# Altium PCB ICAN-7006-STM.PcbDoc (part 1 of 2)
Units mm, origin at the board's own origin, x right, y up, seen from the top; angles counter-clockwise.
Board outline 150 x 80 mm, 3 copper layers (Top Layer, DC3.3V, Bottom Layer); 45 components, 160 nets, 710 pads, 0 vias.
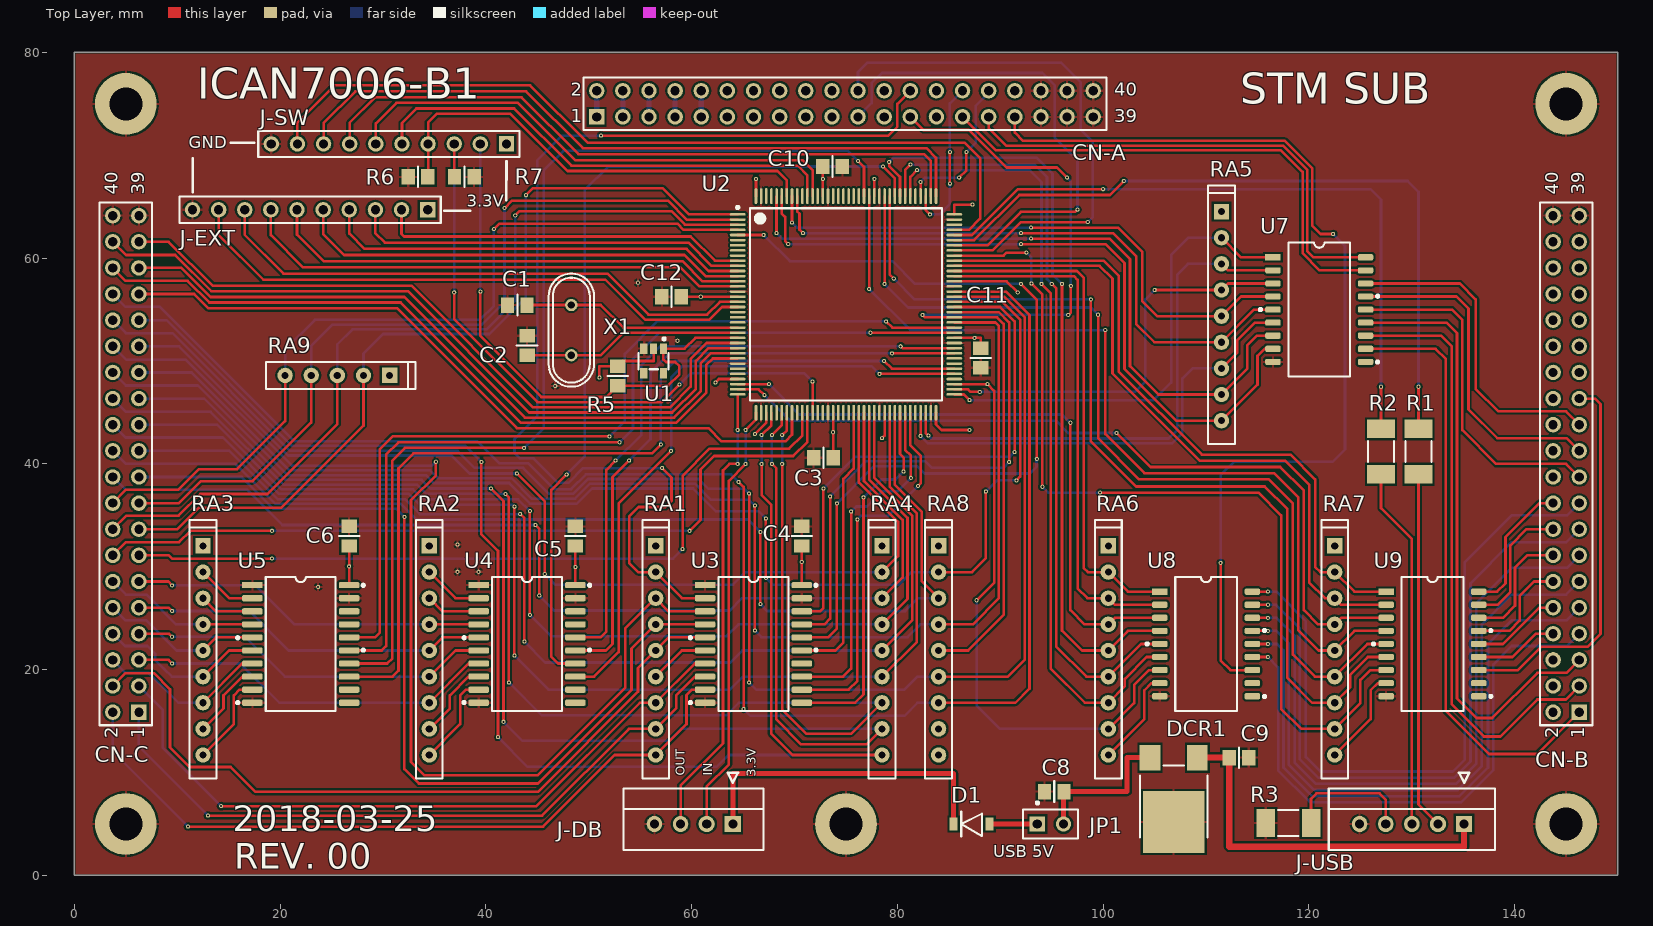
[diagram p0: Top Layer view]
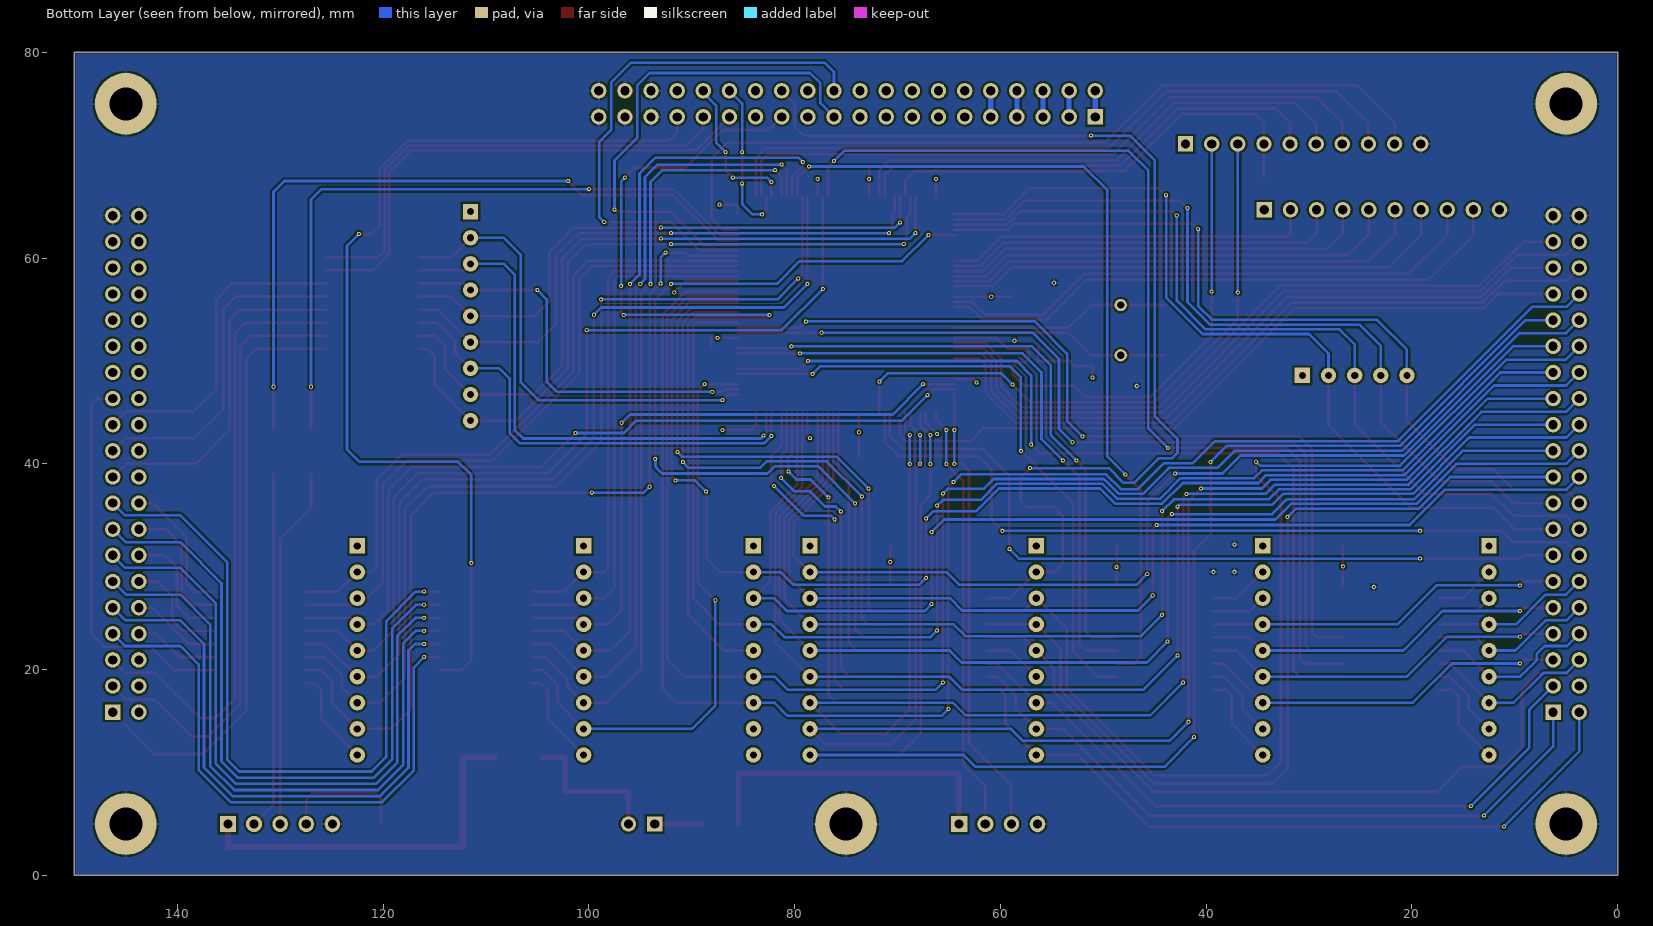
[diagram p1: Bottom Layer view, seen from below]
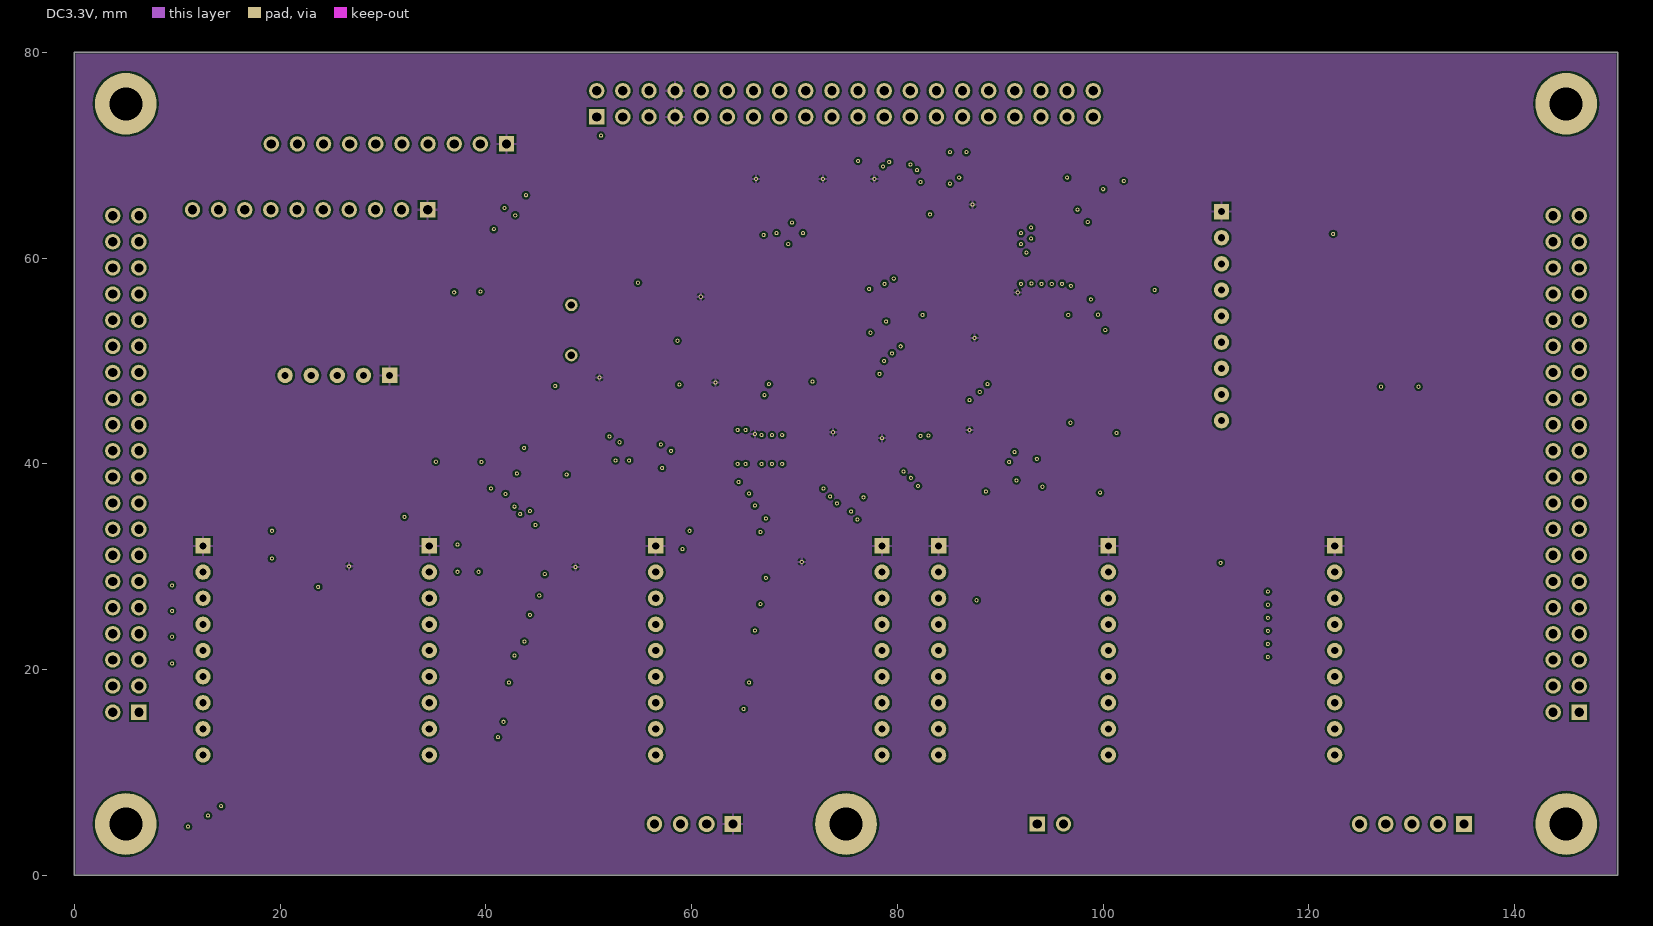
[diagram p2: DC3.3V]

## Layer stack, top to bottom
Top Layer: signal copper 0.0356
Dielectric: core 0.32, FR-4, Dk 4.8
DC3.3V: signal copper 0.0356
Dielectric: prepreg 0.32, FR-4, Dk 4.8
Bottom Layer: signal copper 0.0356

## Board outline
0,0 0,80 150,80 150,0

## Design rules (kind name [scope] priority, off if disabled: settings)
Clearance [All] p1: gap=0.2
FabricationTestPointUsage TestPointUsage [All] p1: valid=0 allowmultiple=FALSE
FabricationTestpoint Testpoint [All] p1: side=3 testpointundercomponent=TRUE minsize=1.016 maxsize=2.54 preferedsize=1.524 minholesize=0 maxholesize=1.016 preferedholesize=0.813 testpointgrid=0.025 allowsidetop=TRUE allowsidebottom=TRUE usegrid=TRUE gridtolerance=0
HoleSize [All] p1: absolutevalues=TRUE maxlimit=4 minlimit=0.025 maxpercent=80.000 minpercent=20.000
PolygonConnect [All] p1: connectstyle=Relief reliefconductorwidth=0.254 reliefentries=4 polygonreliefangle="90 Angle"
RoutingVias [All] p1: holewidth=0.2 width=0.4 viastyle="Through Hole" minholewidth=0.2 minwidth=0.4 maxholewidth=4 maxwidth=8
SilkscreenOverComponentPads [All] p1: minsilkscreentomaskgap=0.254
SolderMaskExpansion [All] p1: expansion=0.102
Width [All] p1: maxlimit=2 minlimit=0.254 preferedwidth=0.254
24 further rules are at their usual default settings.

## Components (designator, comment, footprint, x,y, rotation, side; value= is the part's Value field where it differs from the comment)
C1 "20pF" [0805]2012 43.05,55.44 r180 top
C2 "20pF" [0805]2012 44,51.51 r90 top
C3 "0.1uF" [0805]2012 72.8,40.6 r0 top
C4 "0.1uF" [0805]2012 70.7,32.975 r270 top
C5 "0.1uF" [0805]2012 48.7,32.975 r270 top
C6 "0.1uF" [0805]2012 26.7,32.975 r270 top
C8 "2.2uF" [0805]2012 95.24,8.153 r0 top
C9 "0.33uF" [0805]2012 113.2,11.45 r180 top
C10 "0.1uF" [0805]2012 73.7,68.909 r180 top
C11 "0.1uF" [0805]2012 88.1,50.3 r90 top
C12 "0.1uF" [0805]2012 58.05,56.25 r0 top
CN-A "25-1201-220" HDR2X20 50.77,73.73 r0 top
CN-B "25-1201-220" HDR2X20 146.27,15.87 r90 top
CN-C "25-1201-220" HDR2X20 6.27,15.87 r90 top
D1 "BAT60J" "[1107]2807 DIODE" 87.2,5 r0 top
DCR1 "NJM2845DL1-33" TO-252-3 106.85,5.2 r270 top
J-DB "C3" C3-S4 64,5 r0 top
J-EXT "Header 10" HDR1X10 34.34,64.7 r180 top
J-SW "Header 10" HDR1X10 42,71.1 r180 top
J-USB "C3" C3-S5 135.08,5 r0 top
JP1 "Jumper" PIN2 93.6,5 r0 top
R1 "0" 5025[2010] 130.65,41.2 r270 top
R2 "0" 5025[2010] 127,41.2 r270 top
R3 "100k" 5025[2010] 118,5.1 r0 top
R5 "10k" [0805]2012 52.8,48.55 r90 top
R6 "10k" [0805]2012 33.4,67.9 r180 top
R7 "10k" [0805]2012 37.9,67.9 r0 top
RA1 "1k,1/8w" "SIP 9P" 56.5,32.025 r0 top
RA2 "1k,1/8w" "SIP 9P" 34.5,32.025 r0 top
RA3 "1k,1/8w" "SIP 9P" 12.5,32.025 r0 top
RA4 "1k,1/8w" "SIP 9P" 78.5,32.025 r0 top
RA5 "1k,1/8w" "SIP 9P" 111.5,64.525 r0 top
RA6 "1k,1/8w" "SIP 9P" 100.5,32.025 r0 top
RA7 "1k,1/8w" "SIP 9P" 122.5,32.025 r0 top
RA8 "1k,1/8w" "SIP 9P" 84,32.025 r0 top
RA9 "1k,1/8w" "SIP 5P" 30.64,48.6 r270 top
U1 "BD4828G" PST596 56.3,50 r270 top
U2 "STM32F103ZET6" STM-LQFP144_L 75,55.5 r0 top
U3 "74LVC540ADW" SO-20 66,22.5 r0 top
U4 "74LVC540ADW" SO-20 44,22.5 r0 top
U5 "74LVC540ADW" SO-20 22,22.5 r0 top
U7 "TD62083AFG" TD6208X(SOP) 121,55 r0 top
U8 "TD62083AFG" TD6208X(SOP) 110,22.5 r0 top
U9 "TD62083AFG" TD6208X(SOP) 132,22.5 r0 top
X1 "8MHz" "CRYSTAL 49S" 48.3,53 r90 top

## Footprints (in the part's own frame and the unit in brackets; to place one, negate y for a bottom-side part, rotate by r counter-clockwise, add the part's x,y. Pads: shape width x height; smd on the part's side, far side on the other; paste and mask are expansions set on the pad)
5025[2010] [mm] "Chip Resistor; Body 5.0 x 2.5 mm (LxW typ)"
  rect 1.8x2.7 smd: 1(-2.2,0) 2(2.2,0)
  silkscreen extent -1,-1.25 1,1.25
[0805]2012 [mm] "SMD 2.0x1.25"
  rect 1.3x1.5 smd: 1(-0.95,0) 2(0.95,0)
  silkscreen extent 0,-1 0,1
"[1107]2807 DIODE" [mm] "SMD DIODE 3mm x 1.8mm"
  rect 0.78x1.22 smd: 1(-1.74,0)
  rect 0.8x1.22 smd: 2(1.74,0)
  silkscreen extent -1,-1.2 1,1.2
C3-S4 [mm] "2.54"
  rect 1.575x1.575 hole 0.89: 1(0,0)
  round 1.575 hole 0.89: 2(-2.54,0)
  oval 1.5x1.575 hole 0.89: 3(-5.08,0) 4(-7.62,0)
  silkscreen extent -10.62,-2.54 3,5
C3-S5 [mm] "2.54"
  rect 1.575x1.575 hole 0.89: 1(0,0)
  round 1.575 hole 0.89: 2(-2.54,0)
  oval 1.5x1.575 hole 0.89: 3(-5.08,0) 4(-7.62,0) 5(-10.16,0)
  silkscreen extent -13.16,-2.54 3,5
"CRYSTAL 49S" [mm] "BODY 10.7 x 4.3 PITCH 4.8"
  round 1.2 hole 0.7: 1(-2.44,0) 2(2.44,0)
  silkscreen extent -5.5,-2.2 5.5,2.2
HDR1X10 [mm] "Connector; Header; 10 Position"
  rect 1.5x1.5 hole 0.9: 1(0,0)
  round 1.5 hole 0.9: 2(2.54,0) 3(5.08,0) 4(7.62,0) 5(10.16,0) 6(12.7,0) 7(15.24,0) 8(17.78,0) 9(20.32,0) 10(22.86,0)
  silkscreen extent -1.27,-1.27 24.13,1.27
HDR2X20 [mm] "Connector; Header; 20x2 Position"
  rect 1.5x1.5 hole 0.9: 1(0,0)
  round 1.5 hole 0.9: 2(0,2.54) 3(2.54,0) 4(2.54,2.54) 5(5.08,0) 6(5.08,2.54) 7(7.62,0) 8(7.62,2.54) 9(10.16,0) 10(10.16,2.54) 11(12.7,0) 12(12.7,2.54) 13(15.24,0) 14(15.24,2.54) 15(17.78,0) 16(17.78,2.54) 17(20.32,0) 18(20.32,2.54) 19(22.86,0) 20(22.86,2.54) 21(25.4,0) 22(25.4,2.54) 23(27.94,0) 24(27.94,2.54) 25(30.48,0) 26(30.48,2.54) 27(33.02,0) 28(33.02,2.54) 29(35.56,0) 30(35.56,2.54) 31(38.1,0) 32(38.1,2.54) 33(40.64,0) 34(40.64,2.54) 35(43.18,0) 36(43.18,2.54) 37(45.72,0) 38(45.72,2.54) 39(48.26,0) 40(48.26,2.54)
  silkscreen extent -1.27,-1.27 49.53,3.81
PIN2 [mm] "Photosensitive Diode; 2 Leads"
  rect 1.5x1.5 hole 0.9: 1(0,0)
  round 1.5 hole 0.9: 2(2.54,0)
  silkscreen extent -1.4,-1.4 3.94,2.17
PST596 [mm] "MISUMI RESET IC"
  rect 1x0.7 smd: 1(-1.2,0.95) 2(-1.2,0) 3(-1.2,-0.95) 4(1.2,-0.95) 5(1.2,0.95)
  silkscreen extent -2.28,-1.45 0.8,1.45
"SIP 5P" [mm] "Single inline pitch=2.54"
  rect 1.5x1.5 hole 0.7: 1(0,0)
  round 1.5 hole 0.7: 2(0,-2.54) 3(0,-5.08) 4(0,-7.62) 5(0,-10.16)
  silkscreen extent -1.3,-12 1.3,2.52
"SIP 9P" [mm] "Single inline pitch=2.54"
  rect 1.5x1.5 hole 0.7: 1(0,0)
  round 1.5 hole 0.7: 2(0,-2.54) 3(0,-5.08) 4(0,-7.62) 5(0,-10.16) 6(0,-12.7) 7(0,-15.24) 8(0,-17.78) 9(0,-20.32)
  silkscreen extent -1.3,-22.6 1.3,2.52
SO-20 [mm] "SOP Pitch1.27, 20Pin, W=7.4mm"
  rect 2x0.6 smd: 1(-4.7,5.715)
  rrect50% 2x0.6 smd: 2(-4.7,4.445) 3(-4.7,3.175) 4(-4.7,1.905) 5(-4.7,0.635) 6(-4.7,-0.635) 7(-4.7,-1.905) 8(-4.7,-3.175) 9(-4.7,-4.445) 10(-4.7,-5.715) 11(4.7,-5.715) 12(4.7,-4.445) 13(4.7,-3.175) 14(4.7,-1.905) 15(4.7,-0.635) 16(4.7,0.635) 17(4.7,1.905) 18(4.7,3.175) 19(4.7,4.445) 20(4.7,5.715)
  silkscreen extent -6.25,-6.5 6.2,6.51
STM-LQFP144_L [mm] "Thin QFP, 144-Leads, Body 20x20mm, Pitch 0.5mm, IPC High Density"
  oval 1.55x0.25 smd: 1(-10.525,8.75) 2(-10.525,8.25) 3(-10.525,7.75) 4(-10.525,7.25) 5(-10.525,6.75) 6(-10.525,6.25) 7(-10.525,5.75) 8(-10.525,5.25) 9(-10.525,4.75) 10(-10.525,4.25) 11(-10.525,3.75) 12(-10.525,3.25) 13(-10.525,2.75) 14(-10.525,2.25) 15(-10.525,1.75) 16(-10.525,1.25) 17(-10.525,0.75) 18(-10.525,0.25) 19(-10.525,-0.25) 20(-10.525,-0.75) 21(-10.525,-1.25) 22(-10.525,-1.75) 23(-10.525,-2.25) 24(-10.525,-2.75) 25(-10.525,-3.25) 26(-10.525,-3.75) 27(-10.525,-4.25) 28(-10.525,-4.75) 29(-10.525,-5.25) 30(-10.525,-5.75) 31(-10.525,-6.25) 32(-10.525,-6.75) 33(-10.525,-7.25) 34(-10.525,-7.75) 35(-10.525,-8.25) 36(-10.525,-8.75) 73(10.525,-8.75) 74(10.525,-8.25) 75(10.525,-7.75) 76(10.525,-7.25) 77(10.525,-6.75) 78(10.525,-6.25) 79(10.525,-5.75) 80(10.525,-5.25) 81(10.525,-4.75) 82(10.525,-4.25) 83(10.525,-3.75) 84(10.525,-3.25) 85(10.525,-2.75) 86(10.525,-2.25) 87(10.525,-1.75) 88(10.525,-1.25) 89(10.525,-0.75) 90(10.525,-0.25) 91(10.525,0.25) 92(10.525,0.75) 93(10.525,1.25) 94(10.525,1.75) 95(10.525,2.25) 96(10.525,2.75) 97(10.525,3.25) 98(10.525,3.75) 99(10.525,4.25) 100(10.525,4.75) 101(10.525,5.25) 102(10.525,5.75) 103(10.525,6.25) 104(10.525,6.75) 105(10.525,7.25) 106(10.525,7.75) 107(10.525,8.25) 108(10.525,8.75)
  oval 0.25x1.55 smd: 37(-8.75,-10.525) 38(-8.25,-10.525) 39(-7.75,-10.525) 40(-7.25,-10.525) 41(-6.75,-10.525) 42(-6.25,-10.525) 43(-5.75,-10.525) 44(-5.25,-10.525) 45(-4.75,-10.525) 46(-4.25,-10.525) 47(-3.75,-10.525) 48(-3.25,-10.525) 49(-2.75,-10.525) 50(-2.25,-10.525) 51(-1.75,-10.525) 52(-1.25,-10.525) 53(-0.75,-10.525) 54(-0.25,-10.525) 55(0.25,-10.525) 56(0.75,-10.525) 57(1.25,-10.525) 58(1.75,-10.525) 59(2.25,-10.525) 60(2.75,-10.525) 61(3.25,-10.525) 62(3.75,-10.525) 63(4.25,-10.525) 64(4.75,-10.525) 65(5.25,-10.525) 66(5.75,-10.525) 67(6.25,-10.525) 68(6.75,-10.525) 69(7.25,-10.525) 70(7.75,-10.525) 71(8.25,-10.525) 72(8.75,-10.525) 109(8.75,10.525) 110(8.25,10.525) 111(7.75,10.525) 112(7.25,10.525) 113(6.75,10.525) 114(6.25,10.525) 115(5.75,10.525) 116(5.25,10.525) 117(4.75,10.525) 118(4.25,10.525) 119(3.75,10.525) 120(3.25,10.525) 121(2.75,10.525) 122(2.25,10.525) 123(1.75,10.525) 124(1.25,10.525) 125(0.75,10.525) 126(0.25,10.525) 127(-0.25,10.525) 128(-0.75,10.525) 129(-1.25,10.525) 130(-1.75,10.525) 131(-2.25,10.525) 132(-2.75,10.525) 133(-3.25,10.525) 134(-3.75,10.525) 135(-4.25,10.525) 136(-4.75,10.525) 137(-5.25,10.525) 138(-5.75,10.525) 139(-6.25,10.525) 140(-6.75,10.525) 141(-7.25,10.525) 142(-7.75,10.525) 143(-8.25,10.525) 144(-8.75,10.525)
  silkscreen extent -10.65,-9.35 9.35,9.55, body extent -10,-10 10,10, height 1.6
TD6208X(SOP) [mm]
  rect 1.5x0.6 smd: 1(-4.5,5.08)
  rrect50% 1.5x0.6 smd: 2(-4.5,3.81) 3(-4.5,2.54) 4(-4.5,1.27) 5(-4.5,0) 6(-4.5,-1.27) 7(-4.5,-2.54) 8(-4.5,-3.81) 9(-4.5,-5.08) 10(4.5,-5.08) 11(4.5,-3.81) 12(4.5,-2.54) 13(4.5,-1.27) 14(4.5,0) 15(4.5,1.27) 16(4.5,2.54) 17(4.5,3.81) 18(4.5,5.08)
  silkscreen extent -5.85,-6.5 5.8,6.51
TO-252-3 [mm] "NJM2845"
  rect 2.5x2 smd: 1(-6.25,2.3) 3(-6.25,-2.3)
  rect 6x6 smd: 2(0,0)
  silkscreen extent -5.5,-3.27 1.5,3.27

## Part data
C1 C2 C3 C9 C10 C11 C12: library part "Cap Semi", "Capacitor (Semiconductor SIM Model)"
C4 C5 C6: library part Cap, "Capacitor"
C8: library part "Cap Pol3", "Polarized Capacitor (Surface Mount)"
CN-A CN-B: library part "Header 25X2", "Header, 25-Pin, Dual row"
CN-C: library part "Header 20X2", "Header, 20-Pin, Dual row"
D1: library part Diode, "Default Diode"
DCR1: library part IC10
J-DB: library part "Header 4", "Header, 4-Pin"
J-EXT J-SW: "Header, 10-Pin"
J-USB: library part MHDR1X6, "Header, 6-Pin"
JP1: "Jumper Wire"
R1 R2 R3 R5 R6 R7: library part Res3, "Resistor"
RA1 RA2 RA3 RA4 RA5 RA6 RA7 RA8 RA9: library part "RES 8P"
U1: library part IC5-WIDE
U2: "ARM Cortex-M3 32-bit MCU, 512 KB Flash, 64 KB Internal RAM, 112 I/Os, 144-pin LQFP, -40 to 85 degC, Tray"
U3 U4 U5: library part SN74LS540N, "Octal Buffer and Line Driver with 3-State Outputs"
U7 U8 U9: library part TD62083
X1: library part XTAL, "Crystal Oscillator"

## Free pads (board coordinates)
  round 6 hole 3.2: 0(5,5) 0(5,75) 0(75,5) 0(145,5) 0(145,75)
  round 0.4 hole 0.2: 0(9.5,20.6) 0(9.5,23.2) 0(9.5,25.7) 0(9.5,28.2) 0(11.05,4.75) 0(12.983,5.817) 0(14.269,6.731) 0(19.2,30.8) 0(19.202,33.5) 0(23.698,28.042) 0(26.7,30.048) 0(32.08,34.853) 0(35.128,40.208) 0(36.92,56.68) 0(37.236,29.515) 0(37.236,32.156) 0(39.294,29.515) 0(39.46,56.74) 0(39.561,40.195) 0(40.488,37.615) 0(40.767,62.814) 0(41.171,13.439) 0(41.707,14.935) 0(41.808,64.872) 0(41.91,37.081) 0(42.237,18.745) 0(42.771,21.364) 0(42.774,35.839) 0(42.85,64.16) 0(43.005,39.063) 0(43.332,35.126) 0(43.713,41.554) 0(43.736,22.73) 0(43.891,66.116) 0(44.275,25.329) 0(44.275,35.413) 0(44.806,34.061) 0(45.187,27.203) 0(45.72,29.286) 0(46.736,47.574) 0(47.854,38.964) 0(48.7,29.972) 0(51.029,48.387) 0(51.181,71.907) 0(52,42.678) 0(52.603,40.335) 0(53,42.103) 0(53.927,40.335) 0(54.771,57.608) 0(57,41.885) 0(57.127,39.596) 0(58,41.267) 0(58.623,51.968) 0(58.8,47.7) 0(59.114,31.714) 0(59.8,33.5) 0(60.884,56.25) 0(62.3,47.9) 0(64.475,40) 0(64.475,43.3) 0(64.567,38.24) 0(65.049,16.18) 0(65.25,40) 0(65.25,43.3) 0(65.583,18.745) 0(65.583,37.109) 0(66.139,23.8) 0(66.139,35.944) 0(66.142,42.901) 0(66.25,67.7) 0(66.675,26.365) 0(66.675,33.376) 0(66.8,40) 0(66.8,42.8) 0(67,62.25) 0(67.071,46.679) 0(67.208,28.927) 0(67.208,34.696) 0(67.5,47.75) 0(67.8,40) 0(67.8,42.8) 0(68.25,62.433) 0(68.8,40) 0(68.8,42.8) 0(69.386,61.364) 0(69.75,63.448) 0(70.7,30.48) 0(70.819,62.431) 0(71.75,48) 0(72.75,67.7) 0(72.8,37.596) 0(73.457,36.83) 0(73.75,43.078) 0(74.117,36.17) 0(75.5,35.368) 0(76.1,34.596) 0(76.174,69.445) 0(76.7,36.754) 0(77.25,57) 0(77.368,52.75) 0(77.75,67.7) 0(78.25,48.75) 0(78.5,42.5) 0(78.591,68.909) 0(78.7,50) 0(78.75,57.5) 0(78.902,53.848) 0(79.2,69.35) 0(79.477,50.75) 0(79.643,58) 0(80.318,51.432) 0(80.6,39.25) 0(81.255,69.092) 0(81.3,38.65) 0(81.902,68.552) 0(82,37.85) 0(82.25,42.723) 0(82.25,67.4) 0(82.448,54.483) 0(83.007,42.743) 0(83.16,64.262) 0(85.1,67.234) 0(85.1,70.3) 0(86.004,67.818) 0(86.7,70.3) 0(87,43.3) 0(87,46.2) 0(87.3,65.2) 0(87.5,52.25) 0(87.7,26.746) 0(88,47) 0(88.595,37.313) 0(88.75,47.75) 0(90.853,40.183) 0(91.387,41.145) 0(91.562,38.4) 0(91.694,56.667) 0(92,57.5) 0(92,61.364) 0(92,62.431) 0(92.532,60.528) 0(93,61.897) 0(93,62.964) 0(93.015,57.531) 0(93.546,40.484) 0(94,57.5) 0(94.079,37.779) 0(95,57.5) 0(96,57.5) 0(96.495,67.818) 0(96.6,54.483) 0(96.8,44) 0(96.85,57.302) 0(97.5,64.709) 0(98.5,63.5) 0(98.8,56) 0(99.5,54.5) 0(99.7,37.2) 0(100,66.7) 0(100.2,53) 0(101.3,43) 0(102,67.5) 0(105.005,56.905) 0(111.42,30.38) 0(116,21.23) 0(116,22.5) 0(116,23.77) 0(116,25.04) 0(116,26.31) 0(116,27.58) 0(122.35,62.35) 0(127,47.5) 0(130.65,47.5)

## Nets (pads, with @x,y where several pads share a name; then routed paths per layer and width w, separated by ;. In a path a pad name is that pad's centre, name@x,y a point inside that pad or via, vN(x,y) a via of type N, cw(c..) or ccw(c..) an arc to the next point about the centre after c; other vN are vias at no path point)
*LIGHT_ON: CN-A.33 pad.0@111.42,30.38 pad.0@122.35,62.35 U8.12 | length 95.8
  Top Layer w0.254: CN-A.33@91.41,73.73 91.41,72.19 92.2,71.4 117.652,71.4 120.3,68.752 120.3,63.19 121.14,62.35 pad.0@122.35,62.35 ; pad.0@111.42,30.38 111.42,20.9 112.36,19.96 U8.12@114.5,19.96
  Bottom Layer w0.254: pad.0@111.42,30.38 111.42,38.92 112.7,40.2 122.3,40.2 123.5,41.4 123.5,61.2 pad.0@122.35,62.35
*MF-DIR: CN-B.3 U7.12 | length 59.3
  Top Layer w0.254: U7.12@125.5,52.46 132.84,52.46 133.859,51.441 133.859,16.641 137,13.5 138.6,13.5 142.2,17.1 144.96,17.1 CN-B.3@146.27,18.41
*MF-ENB: CN-B.5 U7.13 | length 59.8
  Top Layer w0.254: U7.13@125.5,53.73 133.37,53.73 134.384,52.716 134.384,17.216 136.3,15.3 137.8,15.3 142.2,19.7 145.02,19.7 CN-B.5@146.27,20.95
*ML-ALM: CN-C.8 RA3.6 U5.6 | length 16.7
  Top Layer w0.254: RA3.6@12.5,19.325 15.04,21.865 U5.6@17.3,21.865
  Bottom Layer w0.254: CN-C.8@3.73,23.49 4.92,22.3 7.1,22.3 7.844,21.556 7.844,20.956 8.731,20.069 9.475,19.325 RA3.6@12.5,19.325
*ML-BRAKE: CN-B.10 U9.14 | length 8.7
  Top Layer w0.254: U9.14@136.5,22.5 138.853,22.5 142.383,26.03 CN-B.10@143.73,26.03
*ML-ENB: CN-B.12 U9.15 | length 10.6
  Top Layer w0.254: U9.15@136.5,23.77 139.47,23.77 140.485,24.785 140.485,27.185 141.87,28.57 CN-B.12@143.73,28.57
*ML-F/*R: CN-B.8 U9.13 | length 8.2
  Top Layer w0.254: U9.13@136.5,21.23 139.772,21.23 142.032,23.49 CN-B.8@143.73,23.49
*ML-PG: CN-C.6 RA3.7 U5.7 | length 16.9
  Top Layer w0.254: RA3.7@12.5,16.785 16.31,20.595 U5.7@17.3,20.595
  Bottom Layer w0.254: CN-C.6@3.73,20.95 4.98,19.7 7.2,19.7 10.115,16.785 RA3.7@12.5,16.785
*MLL-PG_B: CN-C.12 RA3.4 U5.4 | length 15.3
  Top Layer w0.254: RA3.4@12.5,24.405 U5.4@17.3,24.405
  Bottom Layer w0.254: CN-C.12@3.73,28.57 5,27.3 7,27.3 9.895,24.405 RA3.4@12.5,24.405
*MLL-PG_F: CN-C.10 RA3.5 U5.5 | length 15.8
  Top Layer w0.254: RA3.5@12.5,21.865 13.77,23.135 U5.5@17.3,23.135
  Bottom Layer w0.254: CN-C.10@3.73,26.03 4.96,24.8 7,24.8 9.935,21.865 RA3.5@12.5,21.865
*MLR-PG_B: CN-C.11 pad.0@9.5,28.2 RA2.4 U4.4 | length 34.8
  Top Layer w0.254: CN-C.11@6.27,28.57 9.13,28.57 pad.0@9.5,28.2 ; RA2.4@34.5,24.405 U4.4@39.3,24.405
  Bottom Layer w0.254: pad.0@9.5,28.2 17.6,28.2 21.395,24.405 RA2.4@34.5,24.405
*MLR-PG_F: CN-C.9 pad.0@9.5,25.7 RA2.5 U4.5 | length 35.3
  Top Layer w0.254: CN-C.9@6.27,26.03 9.17,26.03 pad.0@9.5,25.7 ; RA2.5@34.5,21.865 35.77,23.135 U4.5@39.3,23.135
  Bottom Layer w0.254: pad.0@9.5,25.7 17,25.7 20.835,21.865 RA2.5@34.5,21.865
*MOTOR_ON1: CN-A.29 U7.17 | length 50
  Top Layer w0.254: CN-A.29@86.33,73.73 89.578,70.482 117.269,70.482 119.38,68.372 119.38,60.476 121.046,58.81 U7.17@125.5,58.81
*MOTOR_ON2: CN-A.31 U7.18 | length 47.6
  Top Layer w0.254: CN-A.31@88.87,73.73 88.87,72.63 90.56,70.94 117.46,70.94 119.835,68.565 119.835,60.665 120.42,60.08 U7.18@125.5,60.08
*MR-ALM: CN-C.7 pad.0@9.5,23.2 RA2.6 U4.6 | length 35.8
  Top Layer w0.254: CN-C.7@6.27,23.49 9.21,23.49 pad.0@9.5,23.2 ; RA2.6@34.5,19.325 37.04,21.865 U4.6@39.3,21.865
  Bottom Layer w0.254: pad.0@9.5,23.2 16.6,23.2 20.475,19.325 RA2.6@34.5,19.325
*MR-BRAKE: CN-B.9 pad.0@116,22.5 U8.14 | length 59.2
  Top Layer w0.254: U8.14@114.5,22.5 pad.0@116,22.5
  Bottom Layer w0.254: pad.0@116,22.5 116.9,22.5 117.525,21.875 117.525,10.475 120.3,7.7 134.622,7.7 137.4,10.478 137.4,22.5 139.7,24.8 145.04,24.8 CN-B.9@146.27,26.03
*MR-ENB: CN-B.11 pad.0@116,23.77 U8.15 | length 61.5
  Top Layer w0.254: U8.15@114.5,23.77 pad.0@116,23.77
  Bottom Layer w0.254: pad.0@116,23.77 116.83,23.77 118.05,22.55 118.05,10.75 120.5,8.3 134.447,8.3 136.794,10.647 136.794,24.394 139.7,27.3 145,27.3 CN-B.11@146.27,28.57
*MR-F/*R: CN-B.7 pad.0@116,21.23 U8.13 | length 56.3
  Top Layer w0.254: U8.13@114.5,21.23 pad.0@116,21.23
  Bottom Layer w0.254: pad.0@116,21.23 117,20.23 117,10.2 120.086,7.114 134.814,7.114 137.925,10.225 137.925,20.525 139.7,22.3 145.08,22.3 CN-B.7@146.27,23.49
*MR-PG: CN-C.5 pad.0@9.5,20.6 RA2.7 U4.7 | length 36.3
  Top Layer w0.254: CN-C.5@6.27,20.95 9.15,20.95 pad.0@9.5,20.6 ; RA2.7@34.5,16.785 38.31,20.595 U4.7@39.3,20.595
  Bottom Layer w0.254: pad.0@9.5,20.6 16.1,20.6 19.915,16.785 RA2.7@34.5,16.785
*SNS-COVER: CN-C.19 pad.0@32.08,34.853 RA1.4 U3.4 | length 90.5
  Top Layer w0.254: pad.0@32.08,34.853 32.08,10.338 33.477,8.941 45.06,8.941 54.153,18.034 54.153,22.058 RA1.4@56.5,24.405 U3.4@61.3,24.405
  Bottom Layer w0.254: CN-C.19@6.27,38.73 16.261,38.73 19.355,35.636 31.297,35.636 pad.0@32.08,34.853
*SNS-HOME_C: CN-C.3 pad.0@14.269,6.731 RA1.7 U3.7 | length 67.8
  Top Layer w0.254: pad.0@14.269,6.731 44.907,6.731 54.961,16.785 RA1.7@56.5,16.785 60.31,20.595 U3.7@61.3,20.595
  Bottom Layer w0.254: CN-C.3@6.27,18.41 8.6,16.08 8.6,12.4 pad.0@14.269,6.731
*SNS-HOME_L: CN-C.2 pad.0@11.05,4.75 RA1.9 U3.9 | length 71.6
  Top Layer w0.254: pad.0@11.05,4.75 45.568,4.75 52.523,11.705 RA1.9@56.5,11.705 59.5,14.705 59.5,17.524 60.031,18.055 U3.9@61.3,18.055
  Bottom Layer w0.254: CN-C.2@3.73,15.87 3.73,12.07 pad.0@11.05,4.75
*SNS-HOME_R: CN-C.1 pad.0@12.983,5.817 RA1.8 U3.8 | length 67.5
  Top Layer w0.254: pad.0@12.983,5.817 45.466,5.817 53.894,14.245 RA1.8@56.5,14.245 58.5,16.245 58.5,17.5 60.325,19.325 U3.8@61.3,19.325
  Bottom Layer w0.254: CN-C.1@6.27,15.87 6.27,12.53 pad.0@12.983,5.817
*SNS-MIC_CLOSE: CN-C.4 RA1.5 U3.5 | length 73.7
  Top Layer w0.254: CN-C.4@3.73,18.41 4.98,19.66 7.722,19.66 9.296,18.085 9.296,12.446 11.201,10.541 15.183,10.541 17.596,8.128 45.06,8.128 54.788,17.856 54.788,20.153 RA1.5@56.5,21.865 57.77,23.135 U3.5@61.3,23.135
*SNS-RAIN: CN-C.30 pad.0@35.128,40.208 RA1.3 U3.3 | length 106.7
  Top Layer w0.254: pad.0@35.128,40.208 35.128,38.887 32.715,36.474 32.715,11.049 34.036,9.728 45.034,9.728 53.54,18.234 53.54,23.985 RA1.3@56.5,26.945 57.77,25.675 U3.3@61.3,25.675
  Bottom Layer w0.254: CN-C.30@3.73,51.43 5.046,50.114 10.841,50.114 21.131,39.823 34.743,39.823 pad.0@35.128,40.208
*SW-A/*M: CN-C.28 pad.0@67.208,28.927 pad.0@67.208,34.696 pad.0@88.595,37.313 pad.0@91.562,38.4 RA8.2 U2.91 | length 131.8
  Top Layer w0.254: pad.0@67.208,28.927 pad.0@67.208,34.696 ; RA8.2@84,29.485 87.245,29.485 88.595,30.836 pad.0@88.595,37.313 ; U2.91@85.525,55.75 90.198,55.75 91.92,54.028 91.92,38.758 pad.0@91.562,38.4
  Bottom Layer w0.254: CN-C.28@3.73,48.89 4.995,47.625 12.009,47.625 20.728,38.906 34.17,38.906 34.928,38.148 42.268,38.148 44.272,36.144 48.844,36.144 50.315,37.615 60.135,37.615 62.368,35.382 66.523,35.382 pad.0@67.208,34.696 ; pad.0@67.205,28.927 67.862,28.27 80.137,28.27 81.352,29.485 RA8.2@84,29.485 ; pad.0@88.595,37.313 89.683,38.4 pad.0@91.562,38.4
*SW-BRAKE: CN-C.27 pad.0@66.139,23.8 pad.0@66.139,35.944 RA8.4 U2.87 | length 135
  Top Layer w0.254: pad.0@66.139,23.8 pad.0@66.139,35.944 ; RA8.4@84.105,24.405 87.321,24.405 89.863,26.947 89.863,53.419 89.531,53.75 U2.87@85.525,53.75
  Bottom Layer w0.254: CN-C.27@6.27,48.89 11.404,48.89 20.927,39.367 34.572,39.367 35.333,38.607 42.465,38.607 44.445,36.627 48.678,36.627 50.123,38.072 60.328,38.072 61.9,36.5 65.583,36.5 pad.0@66.139,35.944 ; pad.0@66.139,23.8 66.774,23.165 81.001,23.165 82.241,24.405 RA8.4@84,24.405
*SW-EMERGENCY: CN-A.25 pad.0@82.448,54.483 pad.0@96.6,54.483 pad.0@96.85,57.302 pad.0@96.495,67.818 RA8.5 U2.88 | length 89.7
  Top Layer w0.254: CN-A.25@81.25,73.73 82.52,72.46 86.945,72.46 90.597,68.809 95.504,68.809 pad.0@96.495,67.818 ; pad.0@82.448,54.483 82.681,54.25 89.692,54.25 90.32,53.622 90.32,25.321 86.864,21.865 RA8.5@84,21.865 ; pad.0@96.6,54.483 96.85,54.733 pad.0@96.85,57.302
  Bottom Layer w0.254: pad.0@82.448,54.483 pad.0@96.6,54.483 ; pad.0@96.495,67.818 96.85,67.462 pad.0@96.85,57.302
*SW-LUG-B_OR: CN-C.24 pad.0@42.771,21.364 pad.0@42.774,35.839 RA4.6 U2.63 | length 122.6
  Top Layer w0.254: pad.0@42.771,21.364 pad.0@42.771,35.839 ; RA4.6@78.5,19.325 81.888,22.713 81.888,35.176 79.25,37.813 U2.63@79.25,44.975
  Bottom Layer w0.254: CN-C.24@3.73,43.81 4.97,42.57 14.422,42.57 19.911,37.081 32.515,37.081 33.581,36.015 42.598,36.015 pad.0@42.774,35.839 ; pad.0@42.771,21.364 46.076,18.059 63.703,18.059 64.969,19.325 RA4.6@78.5,19.325
*SW-LUG-B_POS: CN-C.22 pad.0@66.675,26.365 pad.0@66.675,33.376 RA8.3 U2.64 | length 111.1
  Top Layer w0.254: pad.0@66.675,26.365 pad.0@66.675,33.376 ; U2.64@79.75,44.975 79.75,37.959 82.347,35.363 82.347,28.598 RA8.3@84,26.945
  Bottom Layer w0.254: CN-C.22@3.73,41.27 4.995,40.005 15.658,40.005 19.546,36.117 31.726,36.117 33.251,34.592 65.458,34.592 pad.0@66.675,33.376 ; pad.0@66.675,26.365 67.335,25.705 80.747,25.705 81.987,26.945 RA8.3@84,26.945
*SW-LUG-CENTER: CN-C.20 pad.0@44.806,34.061 pad.0@45.187,27.203 RA4.3 U2.58 | length 104.9
  Top Layer w0.254: pad.0@44.806,34.061 45.187,33.68 pad.0@45.187,27.203 ; U2.58@76.75,44.975 76.75,38.332 80.515,34.567 80.515,28.96 RA4.3@78.5,26.945
  Bottom Layer w0.254: CN-C.20@3.73,38.73 4.97,37.49 16.789,37.49 20.218,34.061 pad.0@44.806,34.061 ; pad.0@45.174,27.216 46.634,25.756 63.703,25.756 64.893,26.945 RA4.3@78.5,26.945
*SW-LUG-F_OR: CN-C.23 pad.0@44.275,25.329 pad.0@44.275,35.413 RA4.4 U2.59 | length 110.3
  Top Layer w0.254: pad.0@44.272,25.326 pad.0@44.275,25.329 pad.0@44.275,35.413 ; U2.59@77.25,44.975 77.25,38.488 80.973,34.766 80.973,26.878 RA4.4@78.5,24.405
  Bottom Layer w0.254: CN-C.23@6.27,43.81 13.843,43.81 20.117,37.535 32.924,37.535 33.912,36.548 43.14,36.548 pad.0@44.275,35.413 ; pad.0@44.272,25.326 46.332,23.266 63.398,23.266 64.537,24.405 RA4.4@78.5,24.405
*SW-LUG-F_POS: CN-C.21 pad.0@43.332,35.126 pad.0@43.736,22.73 RA4.5 U2.60 | length 114.1
  Top Layer w0.254: pad.0@43.332,35.126 43.736,34.722 pad.0@43.736,22.73 ; U2.60@77.75,44.975 77.75,38.653 81.43,34.973 81.43,24.795 RA4.5@78.5,21.865
  Bottom Layer w0.254: CN-C.21@6.27,41.27 15.06,41.27 19.755,36.575 32.136,36.575 33.585,35.126 pad.0@43.332,35.126 ; pad.0@43.736,22.73 45.766,20.701 63.754,20.701 64.918,21.865 RA4.5@78.5,21.865
*SW-LUG_DN: CN-C.34 pad.0@64.567,38.24 pad.0@65.049,16.18 RA8.7 U2.93 | length 165.6
  Top Layer w0.254: pad.0@64.567,38.24 65.049,37.757 pad.0@65.049,16.18 ; RA8.7@84,16.785 91.461,16.785 92.834,18.158 92.834,54.46 90.545,56.75 U2.93@85.525,56.75
  Bottom Layer w0.254: CN-C.34@3.73,56.51 4.97,55.27 8.301,55.27 21.359,42.212 39.137,42.212 41.284,40.065 44.11,40.065 46.634,37.541 48.285,37.541 49.733,38.989 63.817,38.989 pad.0@64.567,38.24 ; pad.0@65.049,16.18 65.714,15.515 80.666,15.515 81.936,16.785 RA8.7@84,16.785
*SW-LUG_UP: CN-C.32 pad.0@65.583,18.745 pad.0@65.583,37.109 RA8.6 U2.92 | length 157.6
  Top Layer w0.254: pad.0@65.583,18.745 pad.0@65.583,37.109 ; RA8.6@84,19.325 90.724,19.325 92.377,20.978 92.377,54.223 90.35,56.25 U2.92@85.525,56.25
  Bottom Layer w0.254: CN-C.32@3.73,53.97 4.995,52.705 9.545,52.705 20.978,41.272 37.239,41.272 38.903,39.608 43.628,39.608 46.154,37.081 48.486,37.081 49.934,38.529 60.658,38.529 61.595,37.592 65.1,37.592 pad.0@65.583,37.109 ; pad.0@65.583,18.745 66.273,18.055 80.666,18.055 81.936,19.325 RA8.6@84,19.325
*SW-MLL_CLOSE: CN-C.16 pad.0@42.85,64.16 RA9.3 U2.3 | length 83.5
  Top Layer w0.254: CN-C.16@3.73,33.65 5.056,34.976 10.135,34.976 12.235,37.076 18.763,37.076 25.56,43.873 RA9.3@25.56,48.6 ; pad.0@42.85,64.16 43.256,64.567 58.039,64.567 59.356,63.25 U2.3@64.475,63.25
  Bottom Layer w0.254: RA9.3@25.56,48.6 25.56,51.631 27.015,53.086 40.056,53.086 42.85,55.88 pad.0@42.85,64.16
*SW-MLL_OPEN: CN-C.18 pad.0@40.767,62.814 RA9.5 U2.4 | length 80.7
  Top Layer w0.254: CN-C.18@3.73,36.19 5.03,37.49 10.109,37.49 12.116,39.497 15.824,39.497 20.48,44.153 RA9.5@20.48,48.6 ; pad.0@40.767,62.814 41.3,63.348 58.614,63.348 59.211,62.75 U2.4@64.475,62.75
  Bottom Layer w0.254: RA9.5@20.48,48.6 20.48,51.112 23.365,53.998 39.393,53.998 40.767,55.372 pad.0@40.767,62.814
*SW-MLR_CLOSE: CN-C.15 pad.0@43.891,66.116 RA9.2 U2.1 | length 82.9
  Top Layer w0.254: CN-C.15@6.27,33.65 10.003,33.65 12.1,35.748 20.12,35.748 28.1,43.727 RA9.2@28.1,48.6 ; pad.0@43.891,66.116 44.552,66.777 57.201,66.777 59.727,64.25 U2.1@64.475,64.25
  Bottom Layer w0.254: RA9.2@28.1,48.6 28.1,50.731 29.995,52.626 40.333,52.626 43.891,56.185 pad.0@43.891,66.116
*SW-MLR_OPEN: CN-C.17 pad.0@41.808,64.872 RA9.4 U2.2 | length 80.8
  Top Layer w0.254: CN-C.17@6.27,36.19 10.155,36.19 12.294,38.329 17.323,38.329 23.02,44.026 RA9.4@23.02,48.6 ; pad.0@41.808,64.846 42.542,65.58 57.681,65.58 59.511,63.75 U2.2@64.475,63.75
  Bottom Layer w0.254: RA9.4@23.02,48.6 23.02,51.468 25.095,53.543 39.599,53.543 41.808,55.753 pad.0@41.808,64.872
*SW-SEAT: CN-C.29 pad.0@43.005,39.063 pad.0@45.72,29.286 RA4.2 U2.57 | length 104.2
  Top Layer w0.254: pad.0@43.005,39.063 45.72,36.347 pad.0@45.72,29.286 ; U2.57@76.25,44.975 76.25,38.177 80.06,34.367 80.06,31.045 RA4.2@78.5,29.485
  Bottom Layer w0.254: CN-C.29@6.27,51.43 10.175,51.43 20.787,40.818 36.652,40.818 38.407,39.063 pad.0@43.005,39.063 ; pad.0@45.72,29.286 46.736,28.27 64.033,28.27 65.248,29.485 RA4.2@78.5,29.485
*SW_CLOSE: CN-C.26 pad.0@41.91,37.081 pad.0@42.237,18.745 pad.0@68.8,40 pad.0@68.8,42.8 RA4.7 U2.43 | length 139.5
  Top Layer w0.254: pad.0@41.91,37.081 42.237,36.754 pad.0@42.237,18.745 ; pad.0@68.8,40 68.8,16.138 71.171,13.767 75.482,13.767 RA4.7@78.5,16.785 ; pad.0@68.8,42.8 69.25,43.25 U2.43@69.25,44.975
  Bottom Layer w0.254: CN-C.26@3.73,46.35 5.02,45.06 13.254,45.06 20.321,37.992 33.306,37.992 34.216,37.081 pad.0@41.91,37.081 ; pad.0@42.237,18.745 45.412,15.57 63.373,15.57 64.588,16.785 RA4.7@78.5,16.785 ; pad.0@68.8,40 pad.0@68.8,42.8
*SW_FORWORD: CN-C.31 pad.0@39.561,40.195 pad.0@41.171,13.439 pad.0@66.8,40 pad.0@66.8,42.8 RA4.9 U2.40 | length 149
  Top Layer w0.254: pad.0@39.561,40.195 39.561,33.159 41.171,31.549 pad.0@41.171,13.439 pad.0@41.173,13.437 ; pad.0@66.8,40 66.8,36.959 67.75,36.009 67.75,13.759 69.804,11.705 RA4.9@78.5,11.705 ; pad.0@66.8,42.8 67.75,43.75 U2.40@67.75,44.975
  Bottom Layer w0.254: CN-C.31@6.27,53.97 8.941,53.97 21.156,41.755 38.001,41.755 pad.0@39.561,40.195 ; pad.0@41.173,13.437 44.046,10.564 62.431,10.564 63.572,11.705 RA4.9@78.5,11.705 ; pad.0@66.8,40 pad.0@66.8,42.8
*SW_OPEN: CN-C.25 pad.0@40.488,37.615 pad.0@41.707,14.935 pad.0@67.8,40 pad.0@67.8,42.8 RA4.8 U2.42 | length 141.3
  Top Layer w0.254: pad.0@40.488,37.615 41.707,36.396 pad.0@41.707,14.935 ; pad.0@67.8,40 68.222,39.578 68.222,15.166 70.637,12.751 77.006,12.751 RA4.8@78.5,14.245 ; pad.0@67.8,42.8 68.75,43.75 U2.42@68.75,44.975
  Bottom Layer w0.254: CN-C.25@6.27,46.35 12.624,46.35 20.524,38.449 33.738,38.449 34.572,37.615 pad.0@40.488,37.615 ; pad.0@41.707,14.935 43.561,13.081 57.785,13.081 58.949,14.245 RA4.8@78.5,14.245 ; pad.0@67.8,40 pad.0@67.8,42.8
AD-48V: CN-C.13 pad.0@19.2,30.8 pad.0@59.114,31.714 U2.46 | length 76
  Top Layer w0.254: CN-C.13@6.27,31.11 9.19,31.11 9.5,30.8 pad.0@19.2,30.8 ; pad.0@59.114,31.714 59.114,38.845 61.747,41.478 69.478,41.478 70.75,42.75 U2.46@70.75,44.975
  Bottom Layer w0.254: pad.0@19.2,30.8 58.2,30.8 pad.0@59.114,31.714
AD-ACC: CN-C.14 pad.0@19.202,33.5 pad.0@59.8,33.5 U2.47 | length 77.8
  Top Layer w0.254: CN-C.14@3.73,31.11 3.73,31.13 5,32.4 10.175,32.4 11.275,33.5 pad.0@19.202,33.5 ; pad.0@59.8,33.5 60.858,34.558 60.858,39.446 62.179,40.767 69.867,40.767 71.25,42.15 U2.47@71.25,44.975
  Bottom Layer w0.254: pad.0@19.202,33.5 pad.0@59.8,33.5
AD-TEMP: CN-C.33 U2.44 | length 71.1
  Top Layer w0.254: CN-C.33@6.27,56.51 11.638,56.51 13.007,55.141 31.359,55.141 43.018,43.482 61.618,43.482 62.9,42.2 69.1,42.2 69.75,42.85 U2.44@69.75,44.247
BOOT0: J-SW.4 R6.1 U2.138 | length 44.7
  Top Layer w0.254: R6.1@34.38,67.93 34.38,73.18 35.22,74.02 42.38,74.02 47.925,68.475 68.325,68.475 69.25,67.55 U2.138@69.25,66.025
BOOT1: J-SW.3 pad.0@36.92,56.68 pad.0@58.8,47.7 pad.0@71.75,48 R7.1 U2.48 | length 63
  Top Layer w0.254: pad.0@36.92,56.68 36.92,54.08 45,46 57.1,46 pad.0@58.8,47.7 ; R7.1@36.92,67.818 J-SW.3@36.92,71.1 ; U2.48@71.75,44.975 pad.0@71.75,48
  Bottom Layer w0.254: pad.0@36.92,56.68 J-SW.3@36.92,71.1 ; pad.0@58.8,47.7 59.9,48.8 70.95,48.8 pad.0@71.75,48